# Altium PCB Altium_2023-04-22.pcbdoc (part 3 of 3)
Units mil, origin at the board's own origin, x right, y up, seen from the top; angles counter-clockwise.
Board outline 4864.16 x 2916.69 mil, 2 copper layers (Top Layer, Bottom Layer); 24 components, 36 nets, 126 pads, 11 vias.
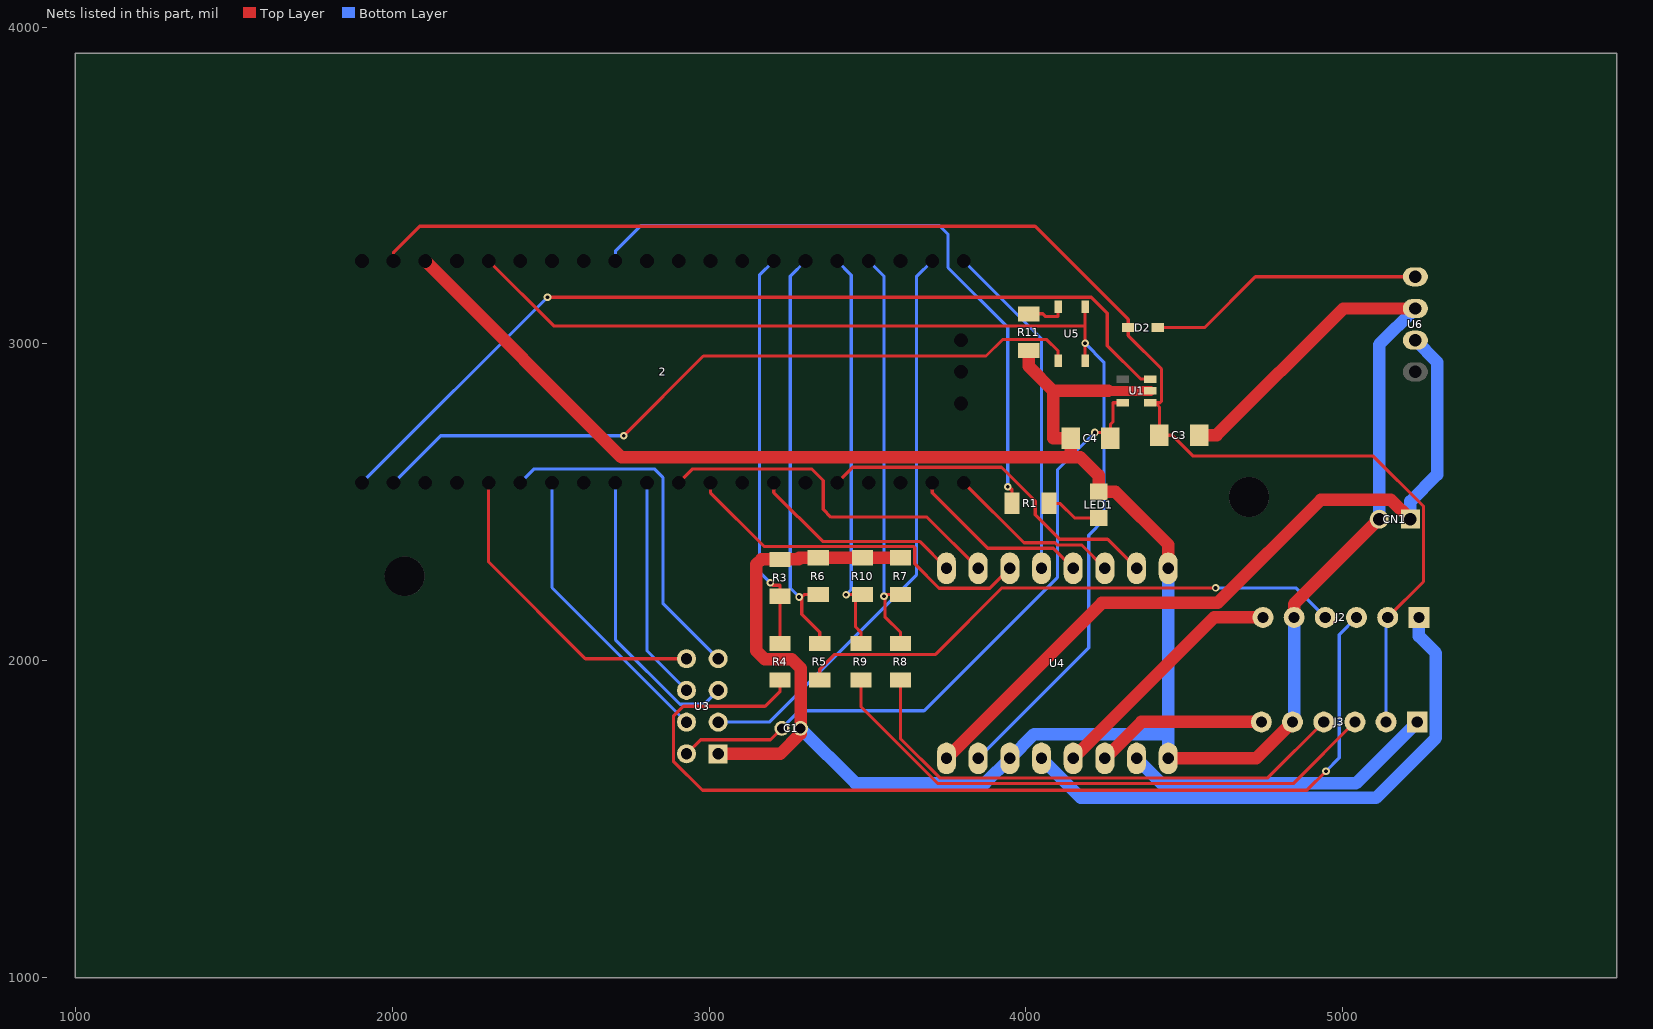
[diagram p3: the nets of this part, all layers, seen from the top]

## Footprints (in the part's own frame and the unit in brackets; to place one, negate y for a bottom-side part, rotate by r counter-clockwise, add the part's x,y. Pads: shape width x height; smd on the part's side, far side on the other; paste and mask are expansions set on the pad) (continued)
RASPBERRYPIPICO [mil] (continued)
  Bottom Layer region: 1832.48,700 1832.22,695.93 1831.46,691.92 1830.2,688.04 1828.46,684.35 1826.27,680.91 1823.67,677.76 1820.7,674.97 1817.4,672.57 1813.83,670.61 1810.03,669.11 1806.08,668.09 1802.04,667.58 1797.96,667.58 1793.91,668.09 1789.96,669.11 1786.17,670.61 1782.59,672.57 1779.29,674.97 1776.32,677.76 1773.72,680.91 1771.53,684.35 1769.8,688.04 1768.54,691.92 1767.77,695.93 1767.52,700 1767.52,764.96 1767.77,769.03 1768.54,773.04 1769.8,776.92 1771.53,780.61 1773.72,784.05 1776.32,787.19 1779.29,789.99 1782.59,792.38 1786.17,794.35 1789.96,795.85 1793.91,796.86 1797.96,797.38 1802.04,797.38 1806.08,796.86 1810.03,795.85 1813.83,794.35 1817.4,792.38 1820.7,789.99 1823.67,787.19 1826.27,784.05 1828.46,780.61 1830.2,776.92 1831.46,773.04 1832.22,769.03 1832.48,764.96
  Bottom Layer region: 1732.48,700 1732.22,695.93 1731.46,691.92 1730.2,688.04 1728.46,684.35 1726.27,680.91 1723.67,677.76 1720.7,674.97 1717.4,672.57 1713.83,670.61 1710.03,669.11 1706.08,668.09 1702.04,667.58 1697.96,667.58 1693.91,668.09 1689.96,669.11 1686.17,670.61 1682.59,672.57 1679.29,674.97 1676.32,677.76 1673.72,680.91 1671.53,684.35 1669.8,688.04 1668.54,691.92 1667.77,695.93 1667.52,700 1667.52,764.96 1667.77,769.03 1668.54,773.04 1669.8,776.92 1671.53,780.61 1673.72,784.05 1676.32,787.19 1679.29,789.99 1682.59,792.38 1686.17,794.35 1689.96,795.85 1693.91,796.86 1697.96,797.38 1702.04,797.38 1706.08,796.86 1710.03,795.85 1713.83,794.35 1717.4,792.38 1720.7,789.99 1723.67,787.19 1726.27,784.05 1728.46,780.61 1730.2,776.92 1731.46,773.04 1732.22,769.03 1732.48,764.96
  Bottom Layer region: 1632.48,700 1632.22,695.93 1631.46,691.92 1630.2,688.04 1628.46,684.35 1626.27,680.91 1623.67,677.76 1620.7,674.97 1617.4,672.57 1613.83,670.61 1610.03,669.11 1606.08,668.09 1602.04,667.58 1597.96,667.58 1593.91,668.09 1589.96,669.11 1586.17,670.61 1582.59,672.57 1579.29,674.97 1576.32,677.76 1573.72,680.91 1571.53,684.35 1569.8,688.04 1568.54,691.92 1567.77,695.93 1567.52,700 1567.52,764.96 1567.77,769.03 1568.54,773.04 1569.8,776.92 1571.53,780.61 1573.72,784.05 1576.32,787.19 1579.29,789.99 1582.59,792.38 1586.17,794.35 1589.96,795.85 1593.91,796.86 1597.96,797.38 1602.04,797.38 1606.08,796.86 1610.03,795.85 1613.83,794.35 1617.4,792.38 1620.7,789.99 1623.67,787.19 1626.27,784.05 1628.46,780.61 1630.2,776.92 1631.46,773.04 1632.22,769.03 1632.48,764.96
  Bottom Layer region: 1532.48,700 1532.22,695.93 1531.46,691.92 1530.2,688.04 1528.46,684.35 1526.27,680.91 1523.67,677.76 1520.7,674.97 1517.4,672.57 1513.83,670.61 1510.03,669.11 1506.08,668.09 1502.04,667.58 1497.96,667.58 1493.91,668.09 1489.96,669.11 1486.17,670.61 1482.59,672.57 1479.29,674.97 1476.32,677.76 1473.72,680.91 1471.53,684.35 1469.8,688.04 1468.54,691.92 1467.77,695.93 1467.52,700 1467.52,764.96 1467.77,769.03 1468.54,773.04 1469.8,776.92 1471.53,780.61 1473.72,784.05 1476.32,787.19 1479.29,789.99 1482.59,792.38 1486.17,794.35 1489.96,795.85 1493.91,796.86 1497.96,797.38 1502.04,797.38 1506.08,796.86 1510.03,795.85 1513.83,794.35 1517.4,792.38 1520.7,789.99 1523.67,787.19 1526.27,784.05 1528.46,780.61 1530.2,776.92 1531.46,773.04 1532.22,769.03 1532.48,764.96
  Bottom Layer region: 1432.48,700 1432.22,695.93 1431.46,691.92 1430.2,688.04 1428.46,684.35 1426.27,680.91 1423.67,677.76 1420.7,674.97 1417.4,672.57 1413.83,670.61 1410.03,669.11 1406.08,668.09 1402.04,667.58 1397.96,667.58 1393.91,668.09 1389.96,669.11 1386.17,670.61 1382.59,672.57 1379.29,674.97 1376.32,677.76 1373.72,680.91 1371.53,684.35 1369.8,688.04 1368.54,691.92 1367.77,695.93 1367.52,700 1367.52,764.96 1367.77,769.03 1368.54,773.04 1369.8,776.92 1371.53,780.61 1373.72,784.05 1376.32,787.19 1379.29,789.99 1382.59,792.38 1386.17,794.35 1389.96,795.85 1393.91,796.86 1397.96,797.38 1402.04,797.38 1406.08,796.86 1410.03,795.85 1413.83,794.35 1417.4,792.38 1420.7,789.99 1423.67,787.19 1426.27,784.05 1428.46,780.61 1430.2,776.92 1431.46,773.04 1432.22,769.03 1432.48,764.96
  Bottom Layer region: 1332.48,700 1332.22,695.93 1331.46,691.92 1330.2,688.04 1328.46,684.35 1326.27,680.91 1323.67,677.76 1320.7,674.97 1317.4,672.57 1313.83,670.61 1310.03,669.11 1306.08,668.09 1302.04,667.58 1297.96,667.58 1293.91,668.09 1289.96,669.11 1286.17,670.61 1282.59,672.57 1279.29,674.97 1276.32,677.76 1273.72,680.91 1271.53,684.35 1269.8,688.04 1268.54,691.92 1267.77,695.93 1267.52,700 1267.52,764.96 1267.77,769.03 1268.54,773.04 1269.8,776.92 1271.53,780.61 1273.72,784.05 1276.32,787.19 1279.29,789.99 1282.59,792.38 1286.17,794.35 1289.96,795.85 1293.91,796.86 1297.96,797.38 1302.04,797.38 1306.08,796.86 1310.03,795.85 1313.83,794.35 1317.4,792.38 1320.7,789.99 1323.67,787.19 1326.27,784.05 1328.46,780.61 1330.2,776.92 1331.46,773.04 1332.22,769.03 1332.48,764.96
  Bottom Layer region: 1232.48,700 1232.22,695.93 1231.46,691.92 1230.2,688.04 1228.46,684.35 1226.27,680.91 1223.67,677.76 1220.7,674.97 1217.4,672.57 1213.83,670.61 1210.03,669.11 1206.08,668.09 1202.04,667.58 1197.96,667.58 1193.91,668.09 1189.96,669.11 1186.17,670.61 1182.59,672.57 1179.29,674.97 1176.32,677.76 1173.72,680.91 1171.53,684.35 1169.8,688.04 1168.54,691.92 1167.77,695.93 1167.52,700 1167.52,764.96 1167.77,769.03 1168.54,773.04 1169.8,776.92 1171.53,780.61 1173.72,784.05 1176.32,787.19 1179.29,789.99 1182.59,792.38 1186.17,794.35 1189.96,795.85 1193.91,796.86 1197.96,797.38 1202.04,797.38 1206.08,796.86 1210.03,795.85 1213.83,794.35 1217.4,792.38 1220.7,789.99 1223.67,787.19 1226.27,784.05 1228.46,780.61 1230.2,776.92 1231.46,773.04 1232.22,769.03 1232.48,764.96
  Bottom Layer region: 1132.48,700 1132.22,695.93 1131.46,691.92 1130.2,688.04 1128.46,684.35 1126.27,680.91 1123.67,677.76 1120.7,674.97 1117.4,672.57 1113.83,670.61 1110.03,669.11 1106.08,668.09 1102.04,667.58 1097.96,667.58 1093.91,668.09 1089.96,669.11 1086.17,670.61 1082.59,672.57 1079.29,674.97 1076.32,677.76 1073.72,680.91 1071.54,684.35 1069.8,688.04 1068.54,691.92 1067.77,695.93 1067.52,700 1067.52,764.96 1067.77,769.03 1068.54,773.04 1069.8,776.92 1071.54,780.61 1073.72,784.05 1076.32,787.19 1079.29,789.99 1082.59,792.38 1086.17,794.35 1089.96,795.85 1093.91,796.86 1097.96,797.38 1102.04,797.38 1106.08,796.86 1110.03,795.85 1113.83,794.35 1117.4,792.38 1120.7,789.99 1123.67,787.19 1126.27,784.05 1128.46,780.61 1130.2,776.92 1131.46,773.04 1132.22,769.03 1132.48,764.96
  Bottom Layer region: 1032.48,700 1032.22,695.93 1031.46,691.92 1030.2,688.04 1028.46,684.35 1026.28,680.91 1023.68,677.76 1020.7,674.97 1017.4,672.57 1013.83,670.61 1010.03,669.11 1006.08,668.09 1002.04,667.58 997.96,667.58 993.91,668.09 989.96,669.11 986.17,670.61 982.59,672.57 979.29,674.97 976.32,677.76 973.72,680.91 971.54,684.35 969.8,688.04 968.54,691.92 967.77,695.93 967.52,700 967.52,764.96 967.77,769.03 968.54,773.04 969.8,776.92 971.54,780.61 973.72,784.05 976.32,787.19 979.29,789.99 982.59,792.38 986.17,794.35 989.96,795.85 993.91,796.86 997.96,797.38 1002.04,797.38 1006.08,796.86 1010.03,795.85 1013.83,794.35 1017.4,792.38 1020.7,789.99 1023.68,787.19 1026.28,784.05 1028.46,780.61 1030.2,776.92 1031.46,773.04 1032.22,769.03 1032.48,764.96
  Bottom Layer region: 932.48,700 932.22,695.93 931.46,691.92 930.2,688.04 928.46,684.35 926.28,680.91 923.68,677.76 920.7,674.97 917.4,672.57 913.83,670.61 910.04,669.11 906.08,668.09 902.04,667.58 897.96,667.58 893.91,668.09 889.96,669.11 886.17,670.61 882.59,672.57 879.29,674.97 876.32,677.76 873.72,680.91 871.54,684.35 869.8,688.04 868.54,691.92 867.77,695.93 867.52,700 867.52,764.96 867.77,769.03 868.54,773.04 869.8,776.92 871.54,780.61 873.72,784.05 876.32,787.19 879.29,789.99 882.59,792.38 886.17,794.35 889.96,795.85 893.91,796.86 897.96,797.38 902.04,797.38 906.08,796.86 910.04,795.85 913.83,794.35 917.4,792.38 920.7,789.99 923.68,787.19 926.28,784.05 928.46,780.61 930.2,776.92 931.46,773.04 932.22,769.03 932.48,764.96
  Bottom Layer region: 832.48,700 832.22,695.93 831.46,691.92 830.2,688.04 828.46,684.35 826.28,680.91 823.68,677.76 820.7,674.97 817.4,672.57 813.83,670.61 810.04,669.11 806.08,668.09 802.04,667.58 797.96,667.58 793.91,668.09 789.96,669.11 786.17,670.61 782.59,672.57 779.29,674.97 776.32,677.76 773.72,680.91 771.54,684.35 769.8,688.04 768.54,691.92 767.77,695.93 767.52,700 767.52,764.96 767.77,769.03 768.54,773.04 769.8,776.92 771.54,780.61 773.72,784.05 776.32,787.19 779.29,789.99 782.59,792.38 786.17,794.35 789.96,795.85 793.91,796.86 797.96,797.38 802.04,797.38 806.08,796.86 810.04,795.85 813.83,794.35 817.4,792.38 820.7,789.99 823.68,787.19 826.28,784.05 828.46,780.61 830.2,776.92 831.46,773.04 832.22,769.03 832.48,764.96
  Bottom Layer region: 732.48,700 732.22,695.93 731.46,691.92 730.2,688.04 728.46,684.35 726.28,680.91 723.68,677.76 720.7,674.97 717.4,672.57 713.83,670.61 710.04,669.11 706.08,668.09 702.04,667.58 697.96,667.58 693.91,668.09 689.96,669.11 686.17,670.61 682.59,672.57 679.29,674.97 676.32,677.76 673.72,680.91 671.54,684.35 669.8,688.04 668.54,691.92 667.77,695.93 667.52,700 667.52,764.96 667.77,769.03 668.54,773.04 669.8,776.92 671.54,780.61 673.72,784.05 676.32,787.19 679.29,789.99 682.59,792.38 686.17,794.35 689.96,795.85 693.91,796.86 697.96,797.38 702.04,797.38 706.08,796.86 710.04,795.85 713.83,794.35 717.4,792.38 720.7,789.99 723.68,787.19 726.28,784.05 728.46,780.61 730.2,776.92 731.46,773.04 732.22,769.03 732.48,764.96
  Bottom Layer region: 632.48,700 632.22,695.93 631.46,691.92 630.2,688.04 628.46,684.35 626.28,680.91 623.68,677.76 620.7,674.97 617.4,672.57 613.83,670.61 610.04,669.11 606.08,668.09 602.04,667.58 597.96,667.58 593.91,668.09 589.96,669.11 586.17,670.61 582.6,672.57 579.3,674.97 576.32,677.76 573.72,680.91 571.54,684.35 569.8,688.04 568.54,691.92 567.77,695.93 567.52,700 567.52,764.96 567.77,769.03 568.54,773.04 569.8,776.92 571.54,780.61 573.72,784.05 576.32,787.19 579.3,789.99 582.6,792.38 586.17,794.35 589.96,795.85 593.91,796.86 597.96,797.38 602.04,797.38 606.08,796.86 610.04,795.85 613.83,794.35 617.4,792.38 620.7,789.99 623.68,787.19 626.28,784.05 628.46,780.61 630.2,776.92 631.46,773.04 632.22,769.03 632.48,764.96
  Bottom Layer region: 532.48,700 532.22,695.93 531.46,691.92 530.2,688.04 528.46,684.35 526.28,680.91 523.68,677.76 520.7,674.97 517.4,672.57 513.83,670.61 510.04,669.11 506.09,668.09 502.04,667.58 497.96,667.58 493.91,668.09 489.96,669.11 486.17,670.61 482.6,672.57 479.3,674.97 476.32,677.76 473.72,680.91 471.54,684.35 469.8,688.04 468.54,691.92 467.77,695.93 467.52,700 467.52,764.96 467.77,769.03 468.54,773.04 469.8,776.92 471.54,780.61 473.72,784.05 476.32,787.19 479.3,789.99 482.6,792.38 486.17,794.35 489.96,795.85 493.91,796.86 497.96,797.38 502.04,797.38 506.09,796.86 510.04,795.85 513.83,794.35 517.4,792.38 520.7,789.99 523.68,787.19 526.28,784.05 528.46,780.61 530.2,776.92 531.46,773.04 532.22,769.03 532.48,764.96
  Bottom Layer region: 432.48,700 432.22,695.93 431.46,691.92 430.2,688.04 428.46,684.35 426.28,680.91 423.68,677.76 420.7,674.97 417.4,672.57 413.83,670.61 410.04,669.11 406.09,668.09 402.04,667.58 397.96,667.58 393.91,668.09 389.96,669.11 386.17,670.61 382.6,672.57 379.3,674.97 376.32,677.76 373.72,680.91 371.54,684.35 369.8,688.04 368.54,691.92 367.78,695.93 367.52,700 367.52,764.96 367.78,769.03 368.54,773.04 369.8,776.92 371.54,780.61 373.72,784.05 376.32,787.19 379.3,789.99 382.6,792.38 386.17,794.35 389.96,795.85 393.91,796.86 397.96,797.38 402.04,797.38 406.09,796.86 410.04,795.85 413.83,794.35 417.4,792.38 420.7,789.99 423.68,787.19 426.28,784.05 428.46,780.61 430.2,776.92 431.46,773.04 432.22,769.03 432.48,764.96
  Bottom Layer region: 332.48,700 332.22,695.93 331.46,691.92 330.2,688.04 328.46,684.35 326.28,680.91 323.68,677.76 320.7,674.97 317.4,672.57 313.83,670.61 310.04,669.11 306.09,668.09 302.04,667.58 297.96,667.58 293.91,668.09 289.96,669.11 286.17,670.61 282.6,672.57 279.3,674.97 276.32,677.76 273.72,680.91 271.54,684.35 269.8,688.04 268.54,691.92 267.78,695.93 267.52,700 267.52,764.96 267.78,769.03 268.54,773.04 269.8,776.92 271.54,780.61 273.72,784.05 276.32,787.19 279.3,789.99 282.6,792.38 286.17,794.35 289.96,795.85 293.91,796.86 297.96,797.38 302.04,797.38 306.09,796.86 310.04,795.85 313.83,794.35 317.4,792.38 320.7,789.99 323.68,787.19 326.28,784.05 328.46,780.61 330.2,776.92 331.46,773.04 332.22,769.03 332.48,764.96
  Bottom Layer region: 232.48,700 232.22,695.93 231.46,691.92 230.2,688.04 228.46,684.35 226.28,680.91 223.68,677.76 220.7,674.97 217.4,672.57 213.83,670.61 210.04,669.11 206.09,668.09 202.04,667.58 197.96,667.58 193.91,668.09 189.96,669.11 186.17,670.61 182.6,672.57 179.3,674.97 176.32,677.76 173.72,680.91 171.54,684.35 169.8,688.04 168.54,691.92 167.78,695.93 167.52,700 167.52,764.96 167.78,769.03 168.54,773.04 169.8,776.92 171.54,780.61 173.72,784.05 176.32,787.19 179.3,789.99 182.6,792.38 186.17,794.35 189.96,795.85 193.91,796.86 197.96,797.38 202.04,797.38 206.09,796.86 210.04,795.85 213.83,794.35 217.4,792.38 220.7,789.99 223.68,787.19 226.28,784.05 228.46,780.61 230.2,776.92 231.46,773.04 232.22,769.03 232.48,764.96
  Bottom Layer region: 132.48,700 132.22,695.93 131.46,691.92 130.2,688.04 128.46,684.35 126.28,680.91 123.68,677.76 120.7,674.97 117.4,672.57 113.83,670.61 110.04,669.11 106.09,668.09 102.04,667.58 97.96,667.58 93.91,668.09 89.96,669.11 86.17,670.61 82.6,672.57 79.3,674.97 76.32,677.76 73.72,680.91 71.54,684.35 69.8,688.04 68.54,691.92 67.78,695.93 67.52,700 67.52,764.96 67.78,769.03 68.54,773.04 69.8,776.92 71.54,780.61 73.72,784.05 76.32,787.19 79.3,789.99 82.6,792.38 86.17,794.35 89.96,795.85 93.91,796.86 97.96,797.38 102.04,797.38 106.09,796.86 110.04,795.85 113.83,794.35 117.4,792.38 120.7,789.99 123.68,787.19 126.28,784.05 128.46,780.61 130.2,776.92 131.46,773.04 132.22,769.03 132.48,764.96
  Bottom Layer region: 32.48,700 32.22,695.93 31.46,691.92 30.2,688.04 28.46,684.35 26.28,680.91 23.68,677.76 20.7,674.97 17.4,672.57 13.83,670.61 10.04,669.11 6.09,668.09 2.04,667.58 -2.04,667.58 -6.09,668.09 -10.04,669.11 -13.83,670.61 -17.4,672.57 -20.7,674.97 -23.68,677.76 -26.28,680.91 -28.46,684.35 -30.2,688.04 -31.46,691.92 -32.22,695.93 -32.48,700 -32.48,764.96 -32.22,769.03 -31.46,773.04 -30.2,776.92 -28.46,780.61 -26.28,784.05 -23.68,787.19 -20.7,789.99 -17.4,792.38 -13.83,794.35 -10.04,795.85 -6.09,796.86 -2.04,797.38 2.04,797.38 6.09,796.86 10.04,795.85 13.83,794.35 17.4,792.38 20.7,789.99 23.68,787.19 26.28,784.05 28.46,780.61 30.2,776.92 31.46,773.04 32.22,769.03 32.48,764.96
  Bottom Layer region: 1890.94,217.52 1886.87,217.78 1882.86,218.54 1878.98,219.8 1875.29,221.54 1871.85,223.72 1868.71,226.32 1865.91,229.3 1863.52,232.6 1861.55,236.17 1860.05,239.96 1859.04,243.91 1858.52,247.96 1858.52,252.04 1859.04,256.09 1860.05,260.04 1861.55,263.83 1863.52,267.4 1865.91,270.7 1868.71,273.68 1871.85,276.28 1875.29,278.46 1878.98,280.2 1882.86,281.46 1886.87,282.22 1890.94,282.48 1955.9,282.48 1959.97,282.22 1963.98,281.46 1967.86,280.2 1971.55,278.46 1974.99,276.28 1978.14,273.68 1980.93,270.7 1983.33,267.4 1985.29,263.83 1986.79,260.04 1987.81,256.09 1988.32,252.04 1988.32,247.96 1987.81,243.91 1986.79,239.96 1985.29,236.17 1983.33,232.6 1980.93,229.3 1978.14,226.32 1974.99,223.72 1971.55,221.54 1967.86,219.8 1963.98,218.54 1959.97,217.78 1955.9,217.52
  Bottom Layer region: 1890.94,317.52 1886.87,317.78 1882.86,318.54 1878.98,319.8 1875.29,321.54 1871.85,323.72 1868.71,326.32 1865.91,329.3 1863.52,332.6 1861.55,336.17 1860.05,339.96 1859.04,343.91 1858.52,347.96 1858.52,352.04 1859.04,356.09 1860.05,360.04 1861.55,363.83 1863.52,367.4 1865.91,370.7 1868.71,373.68 1871.85,376.28 1875.29,378.46 1878.98,380.2 1882.86,381.46 1886.87,382.22 1890.94,382.48 1955.9,382.48 1959.97,382.22 1963.98,381.46 1967.86,380.2 1971.55,378.46 1974.99,376.28 1978.14,373.68 1980.93,370.7 1983.33,367.4 1985.29,363.83 1986.79,360.04 1987.81,356.09 1988.32,352.04 1988.32,347.96 1987.81,343.91 1986.79,339.96 1985.29,336.17 1983.33,332.6 1980.93,329.3 1978.14,326.32 1974.99,323.72 1971.55,321.54 1967.86,319.8 1963.98,318.54 1959.97,317.78 1955.9,317.52
  Bottom Layer region: 1890.94,417.52 1886.87,417.77 1882.86,418.54 1878.98,419.8 1875.29,421.54 1871.85,423.72 1868.71,426.32 1865.91,429.3 1863.52,432.6 1861.55,436.17 1860.05,439.96 1859.04,443.91 1858.52,447.96 1858.52,452.04 1859.04,456.09 1860.05,460.04 1861.55,463.83 1863.52,467.4 1865.91,470.7 1868.71,473.68 1871.85,476.28 1875.29,478.46 1878.98,480.2 1882.86,481.46 1886.87,482.22 1890.94,482.48 1955.9,482.48 1959.97,482.22 1963.98,481.46 1967.86,480.2 1971.55,478.46 1974.99,476.28 1978.14,473.68 1980.93,470.7 1983.33,467.4 1985.29,463.83 1986.79,460.04 1987.81,456.09 1988.32,452.04 1988.32,447.96 1987.81,443.91 1986.79,439.96 1985.29,436.17 1983.33,432.6 1980.93,429.3 1978.14,426.32 1974.99,423.72 1971.55,421.54 1967.86,419.8 1963.98,418.54 1959.97,417.77 1955.9,417.52
  silkscreen extent -150,-63 1954,763
SOD-323_L1.8-W1.3-LS2.5-RD [mm]
  rect 1x0.75 smd: 1(-1.173,0) 2(1.173,0)
  silkscreen extent -1.08,-0.8 0.9,0.8
SOT-23-5_L2.9-W1.6-P0.95-LS2.8-BR [mm]
  rect 1x0.6 smd: 1(1.1,-0.95) 2(1.1,0) 3(1.1,0.95) 4(-1.1,0.95) 5(-1.1,-0.95)
  silkscreen extent -0.89,-1.52 0.7,1.4
TB6612FNG [mil]
  oval 100x60 hole 36: 1(-300,350) 2(-300,250) 3(-300,150) 4(-300,50) 5(-300,-50) 6(-300,-150) 7(-300,-250) 8(-300,-350) 9(300,350) 10(300,250) 11(300,150) 12(300,50) 13(300,-50) 14(300,-150) 15(300,-250) 16(300,-350)
  silkscreen extent -350,-400 350,400

## Free pads (board coordinates)
  round 125.98 hole 125.98 unplated: ""(2039.17,2266.7) ""(4704.17,2516.7)

## Via types
v1: diameter 24.02, hole 12.01, Top Layer to Bottom Layer, tented both sides, 11 vias

## Nets (pads, with @x,y where several pads share a name; then routed paths per layer and width w, separated by ;. In a path a pad name is that pad's centre, name@x,y a point inside that pad or via, vN(x,y) a via of type N, cw(c..) or ccw(c..) an arc to the next point about the centre after c; other vN are vias at no path point)
2_GP27: 2.GP27 R1.2 | length 2061
  Top Layer w10: v1(3942.68,2548.93) 3950.44,2541.17 3955.95,2541.17 R1.2@3955.95,2496.7
  Bottom Layer w10: 2.GP27@2704.17,3261.7 2704.17,3292.25 2784.67,3372.75 3727.29,3372.75 3754.17,3345.87 3754.17,3240.7 3942.68,3052.19 v1(3942.68,2548.93)
+3.3V: 2.3V3(OUT) U4.2 U5.2 U5.4 | length 3636.4
  Top Layer w10: 2304.17,3261.7 2509.07,3056.8 4186.69,3056.8 ; U5.4@4186.69,2946.7 4186.69,3001.75 4186.69,3056.8 ; U5.2@4186.69,3116.7 4186.69,3056.8
  Bottom Layer w10: U4.2@3849.17,1691.7 4198.43,2040.96 4198.43,2396.5 4246.07,2444.14 4246.07,2942.37 v1@4186.69,3001.75
  other v1: 4186.69,3001.75
+5V: 2.VSYS C3.2 D2.1 J2.2 J3.2 U1.1 | length 4605.3
  Top Layer w10: 2.VSYS@2004.17,3261.7 2004.17,3289 2086.54,3371.37 4029.09,3371.37 4323.01,3077.45 D2.1@4323.01,3051.7 4323.01,3038.83 4323.01,3025.95 4427.8,2921.16 4427.8,2818.95 4423.15,2814.3 U1.1@4407.82,2814.3 ; U1.1@4392.48,2814.3 U1.1@4407.82,2814.3 ; J2.2@5141.81,2136.7 5254.7,2249.59 5254.7,2487.81 5096.78,2645.73 4527.67,2645.73 4461.7,2711.7 C3.2@4421.48,2711.7 4421.47,2800.65 U1.1@4407.82,2814.3
  Bottom Layer w10: J3.2@5136.81,1806.7 5136.81,2131.7 J2.2@5141.81,2136.7
+12V: CN1.1 U4.1 U6.2 | length 2456.3
  Top Layer w39.37: U4.1@3749.17,1691.7 4239.87,2182.4 4605.04,2182.4 4930.5,2507.86 5152.22,2507.86 CN1.1@5213.39,2446.7
  Bottom Layer w39.37: CN1.1@5213.39,2446.7 5213.38,2502.7 5298.16,2587.48 5298.16,2942.71 U6.2@5229.17,3011.7
AIN1: 2.GP9 U4.11 | length 1157.3
  Top Layer w10: 2.GP9@3004.17,2561.7 3004.17,2530.69 3174.85,2360.01 3646.06,2360.01 3648.97,2357.1 3648.97,2305.48 3725.58,2228.87 3886.34,2228.87 U4.11@3949.17,2291.7
AIN2: 2.GP8 U4.10 | length 1146.4
  Top Layer w10: 2.GP8@2904.17,2561.7 2947.89,2605.42 3323.33,2605.42 3360.12,2568.63 3360.12,2477.64 3384.5,2453.26 3687.61,2453.26 U4.10@3849.17,2291.7
BIN1: 2.GP14 U4.13 | length 575.2
  Top Layer w10: 2.GP14@3704.17,2561.7 3704.17,2530.27 3879.69,2354.75 4086.12,2354.75 U4.13@4149.17,2291.7
BIN2: 2.GP15 U4.14 | length 556.8
  Top Layer w10: 2.GP15@3804.17,2561.7 3993.79,2372.08 4091.5,2372.08 4097.96,2365.62 4175.25,2365.62 U4.14@4249.17,2291.7
CE: 2.GP17 U3.3 | length 1829.9
  Bottom Layer w10: U3.3@3028.62,1806.3 3190.23,1806.31 3654.17,2270.25 3654.17,3211.7 2.GP17@3704.17,3261.7
CSN: 2.GP5 U3.4 | length 931.2
  Bottom Layer w10: 2.GP5@2504.17,2561.7 2504.17,2230.76 U3.4@2928.62,1806.3
GND: 2.GND4 C1.2 C3.1 C4.1 CN1.2 J2.5 J3.5 LED1.2 R3.2 R6.2 R7.2 R10.2 R11.2 U1.2 U3.1 U4.3 U4.8 U4.16 U6.3 | length 9595.2
  Top Layer w31.5: 4260.16,2851.7 U1.2@4392.48,2851.7
  Top Layer w39.37: 2.GND4@2104.17,3261.7 2724.19,2641.68 4141.47,2641.68 ; U3.1@3028.62,1706.3 3225.07,1706.31 3288.7,1769.94 C1.2@3288.7,1786.7 3288.7,1976.71 3260.27,2005.14 3175.08,2005.14 3149.37,2030.85 3149.37,2304.6 3164.69,2319.92 R3.2@3224.17,2319.92 3253.91,2319.92 3283.65,2319.92 3283.65,2323.88 3284.69,2324.92 R6.2@3344.17,2324.92 R10.2@3484.17,2324.92 R7.2@3604.17,2324.92 ; R11.2@4009.17,2978.48 4009.17,2928.71 4009.23,2928.71 4086.24,2851.7 ; 4260.16,2851.7 4086.24,2851.7 ; U4.8@4449.17,1691.7 4726.53,1691.7 J3.5@4841.53,1806.7 ; U4.16@4449.17,2291.7 4449.17,2366.6 4282.72,2533.05 LED1.2@4229.17,2533.05 4229.17,2584.65 4172.14,2641.68 4141.47,2641.68 ; C3.1@4546.87,2711.7 4602.1,2711.7 5002.1,3111.7 U6.3@5229.17,3111.7 ; J2.5@4846.53,2136.7 4846.53,2178.27 CN1.2@5114.96,2446.7 ; 4086.24,2851.7 4086.24,2701.7 C4.1@4141.48,2701.7 4141.47,2641.68
  Bottom Layer w39.37: C1.2@3288.7,1786.7 3461.94,1613.46 3870.93,1613.46 U4.3@3949.17,1691.7 4025.68,1768.21 4449.17,1768.21 ; U4.8@4449.17,1691.7 4449.17,1768.21 ; U4.16@4449.17,2291.7 4449.17,1768.21 ; J3.5@4841.53,1806.7 4846.53,1811.7 J2.5@4846.53,2136.7 ; CN1.2@5114.96,2446.7 5114.96,2997.49 U6.3@5229.17,3111.7
IRQ: 2.GP3 U3.8 | length 1000.9
  Top Layer w10: 2.GP3@2304.17,2561.7 2304.17,2311.7 2609.56,2006.31 U3.8@2928.62,2006.3
J2_3: J2.3 R4.1 | length 3194.3
  Top Layer w10: R4.1@3224.17,1938.48 3224.17,1903.72 3176.76,1856.31 2918.7,1856.31 2887.35,1824.96 2887.35,1682.77 2979.09,1591.03 4886.71,1591.03 v1(4947,1651.32)
  Bottom Layer w10: v1(4947,1651.32) 4989.02,1693.34 4989.02,2082.34 J2.3@5043.39,2136.7
J2_4: J2.4 R5.1 | length 1775.5
  Top Layer w10: R5.1@3349.17,1938.48 3349.17,1973.24 3396.02,2020.09 3714.76,2020.09 3924.59,2229.92 v1(4598.81,2229.92)
  Bottom Layer w10: v1(4598.81,2229.92) 4851.74,2229.92 J2.4@4944.96,2136.7
LDO_3.3V: C1.1 C4.2 U1.5 U3.2 | length 2103.9
  Top Layer w10: U3.2@2928.62,1706.3 2973.09,1750.78 3193.72,1750.78 C1.1@3229.64,1786.7 ; v1(4217.69,2720.37) C4.2@4266.87,2720.37 ; C4.2@4266.87,2701.7 C4.2@4266.87,2720.37 ; U1.5@4305.86,2814.3 4275.19,2814.3 4275.19,2755.03 4266.87,2746.71 C4.2@4266.87,2720.37
  Bottom Layer w10: C1.1@3229.64,1786.7 3284.81,1841.87 3678.66,1841.87 4099.17,2262.38 4099.17,2601.85 v1(4217.69,2720.37)
LDO_EN: 2.GP0 U1.3 | length 2898.4
  Top Layer w10: v1(2489.92,3147.45) 4206.65,3147.45 4256.92,3097.18 4256.92,2993.99 4361.81,2889.1 U1.3@4392.48,2889.09
  Bottom Layer w10: 2.GP0@1904.17,2561.7 v1(2489.92,3147.45)
M0+: J2.6 U4.5 | length 783.3
  Top Layer w39.37: U4.5@4149.17,1691.7 4594.17,2136.7 J2.6@4748.11,2136.7
M0-: J2.1 U4.4 | length 1777.4
  Bottom Layer w39.37: U4.4@4049.17,1691.7 4173.52,1567.35 5104.91,1567.35 5294.24,1756.68 5294.24,2023.69 5240.23,2077.7 J2.1@5240.24,2136.7
M0_ENC_A: 2.GP20 R5.2 R6.1 | length 1325
  Top Layer w10: v1@3284.17,2201.15 v1@3292.37,2201.15 ; R6.1@3344.17,2208.48 3299.7,2208.48 v1@3292.37,2201.15 ; R5.2@3349.17,2054.92 3349.17,2089.68 3292.37,2146.48 v1@3292.37,2201.15
  Bottom Layer w10: v1@3284.17,2201.15 3255.97,2229.35 3255.97,3213.5 2.GP20@3304.17,3261.7
  other v1: 3284.17,2201.15
M0_ENC_B: 2.GP21 R3.1 R4.2 | length 1266.1
  Top Layer w10: v1(3193.37,2245.98) 3201.11,2238.24 3224.17,2238.24 R3.1@3224.17,2203.48 R4.2@3224.17,2054.92
  Bottom Layer w10: v1(3193.37,2245.98) 3158.85,2280.5 3158.85,3216.38 2.GP21@3204.17,3261.7
M1+: J3.6 U4.6 | length 541.6
  Top Layer w39.37: U4.6@4249.17,1691.7 4364.17,1806.7 J3.6@4743.11,1806.7
M1-: J3.1 U4.7 | length 998.9
  Bottom Layer w39.37: U4.7@4349.17,1691.7 4427.82,1613.05 5041.58,1613.05 J3.1@5235.24,1806.7
M1_ENC_A: 2.GP18 R7.1 R8.2 | length 1301.1
  Top Layer w10: v1(3552.19,2203.65) v1@3554.87,2203.65 ; R8.2@3604.17,2054.92 3604.17,2089.68 3554.87,2138.98 v1@3554.87,2203.65 ; R7.1@3604.17,2208.48 3559.7,2208.48 v1@3554.87,2203.65
  Bottom Layer w10: 2.GP18@3504.17,3261.7 3552.19,3213.68 v1(3552.19,2203.65)
M1_ENC_B: 2.GP19 R9.2 R10.1 | length 1290.9
  Top Layer w10: v1(3432.44,2208.48) 3439.7,2208.48 R10.1@3461.94,2208.48 ; R9.2@3479.17,2054.92 3479.17,2089.68 3461.94,2106.91 R10.1@3461.94,2208.48 ; R10.1@3484.17,2208.48 R10.1@3461.94,2208.48
  Bottom Layer w10: 2.GP19@3404.17,3261.7 3448.73,3217.14 3448.73,2224.77 v1(3432.44,2208.48)
M_STBY: 2.GP16 U4.12 | length 1071.5
  Bottom Layer w10: 2.GP16@3804.17,3261.7 4049.17,3016.7 U4.12@4049.17,2291.7
MISO: 2.GP4 U3.7 | length 1123.8
  Bottom Layer w10: 2.GP4@2404.17,2561.7 2448.03,2605.56 2827.1,2605.56 2854.17,2578.49 2854.17,2180.76 U3.7@3028.62,2006.3
MOSI: 2.GP7 U3.6 | length 706.9
  Bottom Layer w10: 2.GP7@2804.17,2561.7 2804.17,2030.76 U3.6@2928.62,1906.3
PWMA: 2.GP10 U4.9 | length 675
  Top Layer w10: 2.GP10@3204.17,2561.7 3204.17,2530.69 3358.37,2376.49 3664.38,2376.49 U4.9@3749.17,2291.7
PWMB: 2.GP12 U4.15 | length 1123
  Top Layer w10: 2.GP12@3404.17,2561.7 3453.14,2610.67 3922.72,2610.67 4029.29,2504.1 4029.29,2460.47 4106.54,2383.22 4257.65,2383.22 U4.15@4349.17,2291.7
R1_1: LED1.1 R1.1 | length 176
  Top Layer w10: R1.1@4072.39,2496.7 4107.15,2496.7 4153.5,2450.35 LED1.1@4229.17,2450.35
R8_1: J3.4 R8.1 | length 1645.2
  Top Layer w10: R8.1@3604.17,1938.48 3604.17,1753.29 3727.41,1630.05 4763.31,1630.05 J3.4@4939.96,1806.7
R9_1: J3.3 R9.1 | length 1823.5
  Top Layer w10: R9.1@3479.17,1938.48 3479.17,1855.42 3722.35,1612.24 4843.92,1612.24 J3.3@5038.39,1806.7
SCK: 2.GP6 U3.5 | length 922.2
  Bottom Layer w10: 2.GP6@2704.17,2561.7 2704.17,2066.59 2908.2,1862.56 2984.87,1862.56 U3.5@3028.62,1906.3
U5_1: R11.1 U5.1 | length 126.9
  Top Layer w10: R11.1@4009.17,3094.92 4053.64,3094.92 4062.53,3086.03 4101.67,3086.03 U5.1@4101.67,3116.7
U6_4: D2.2 U6.4 | length 880.1
  Top Layer w10: D2.2@4415.34,3051.7 4564.17,3051.7 4724.17,3211.7 U6.4@5229.17,3211.7
UPLOAD_BTN: 2.GP1 U5.3 | length 2330.3
  Top Layer w10: v1(2730.38,2710.24) 2981.84,2961.7 3874.13,2961.7 3926,3013.57 4065.48,3013.57 4101.67,2977.38 U5.3@4101.67,2946.7
  Bottom Layer w10: 2.GP1@2004.17,2561.7 2152.71,2710.24 v1(2730.38,2710.24)
pads on no net: 2.3V3_EN 2.ADC_VREF 2.GND 2.GND1 2.GND2 2.GND3 2.GND5 2.GND6 2.GND7 2.GND8 2.GP2 2.GP11 2.GP13 2.GP22 2.GP26 2.GP28 2.RUN 2.SWCLK 2.SWDIO 2.VBUS U1.4 U6.1

## Keep-outs
Keep-Out Layer:
  lines w10: 1849.17,1544.37 ccw(c1888.54,1544.37) 1888.54,1505 ; 1849.17,3372.32 cw(c1888.54,3372.32) 1888.54,3411.69 ; 5319.8,1505 ccw(c5319.8,1544.37) 5359.16,1544.37 ; 5319.8,3411.69 cw(c5319.8,3372.32) 5359.16,3372.32

## Text inside footprints (layer, text, board x,y; h text height)
2: Top Overlay "Raspberry Pi Pico" at 2504.17,2861.7 h50
U3: Top Overlay "GND" at 2844.17,1755.32 h47.24 r180; Top Overlay "VCC" at 2644.17,1755.32 h47.24 r180; Top Overlay "CSN" at 2643.58,1855.91 h47.24 r180; Top Overlay "CE" at 2843.58,1855.91 h47.24 r180; Top Overlay "MOSI" at 2599.17,2035.32 h47.24 r180; Top Overlay "SCK" at 2844.17,1950.32 h47.24 r180; Top Overlay "IRQ" at 2645.41,2045.29 h47.24 r177; Top Overlay "MISO" at 2844.17,2045.32 h47.24 r180
U4: Top Overlay "VCC" at 3775.98,1756.7 h23.62 r90; Top Overlay "VS" at 3875.98,1756.7 h23.62 r90; Top Overlay "GND" at 3975.98,1756.7 h23.62 r90; Top Overlay "AO1" at 4070.98,1756.7 h23.62 r90; Top Overlay "AO2" at 4175.98,1756.7 h23.62 r90; Top Overlay "BO2" at 4275.98,1756.7 h23.62 r90; Top Overlay "BO1" at 4375.98,1756.7 h23.62 r90; Top Overlay "GND" at 4470.98,1756.7 h23.62 r90; Top Overlay "PWMA" at 3770.98,2136.7 h23.62 r90; Top Overlay "AIN2" at 3870.98,2156.7 h23.62 r90; Top Overlay "AIN1" at 3970.98,2161.7 h23.62 r90; Top Overlay "STBY" at 4070.98,2146.7 h23.62 r90; Top Overlay "BIN1" at 4170.98,2166.7 h23.62 r90; Top Overlay "BIN2" at 4270.98,2161.7 h23.62 r90; Top Overlay "PWMB" at 4370.98,2136.7 h23.62 r90; Top Overlay "GND" at 4470.98,2161.7 h23.62 r90
U6: Top Overlay "24-3.3v" at 4988.43,3236.7 h31.5 r270; Top Overlay "BUCK" at 4988.43,2986.7 h31.5 r270; Top Overlay "EN" at 5079.17,2865.95 h31.5; Top Overlay "IN+" at 5079.17,2970.95 h31.5; Top Overlay "GND" at 5079.17,3065.95 h31.5; Top Overlay "VO+" at 5079.17,3165.95 h31.5